# Altium PCB smart-water-sensor.PcbDoc (part 4 of 5)
Units mm, origin at the board's own origin, x right, y up, seen from the top; angles counter-clockwise.
Board outline 124.33 x 108.9 mm, 4 copper layers (Top Layer, Layer 1, Layer 2, Bottom Layer), stack 0.603 mm thick; 150 components, 74 nets, 469 pads, 463 vias.
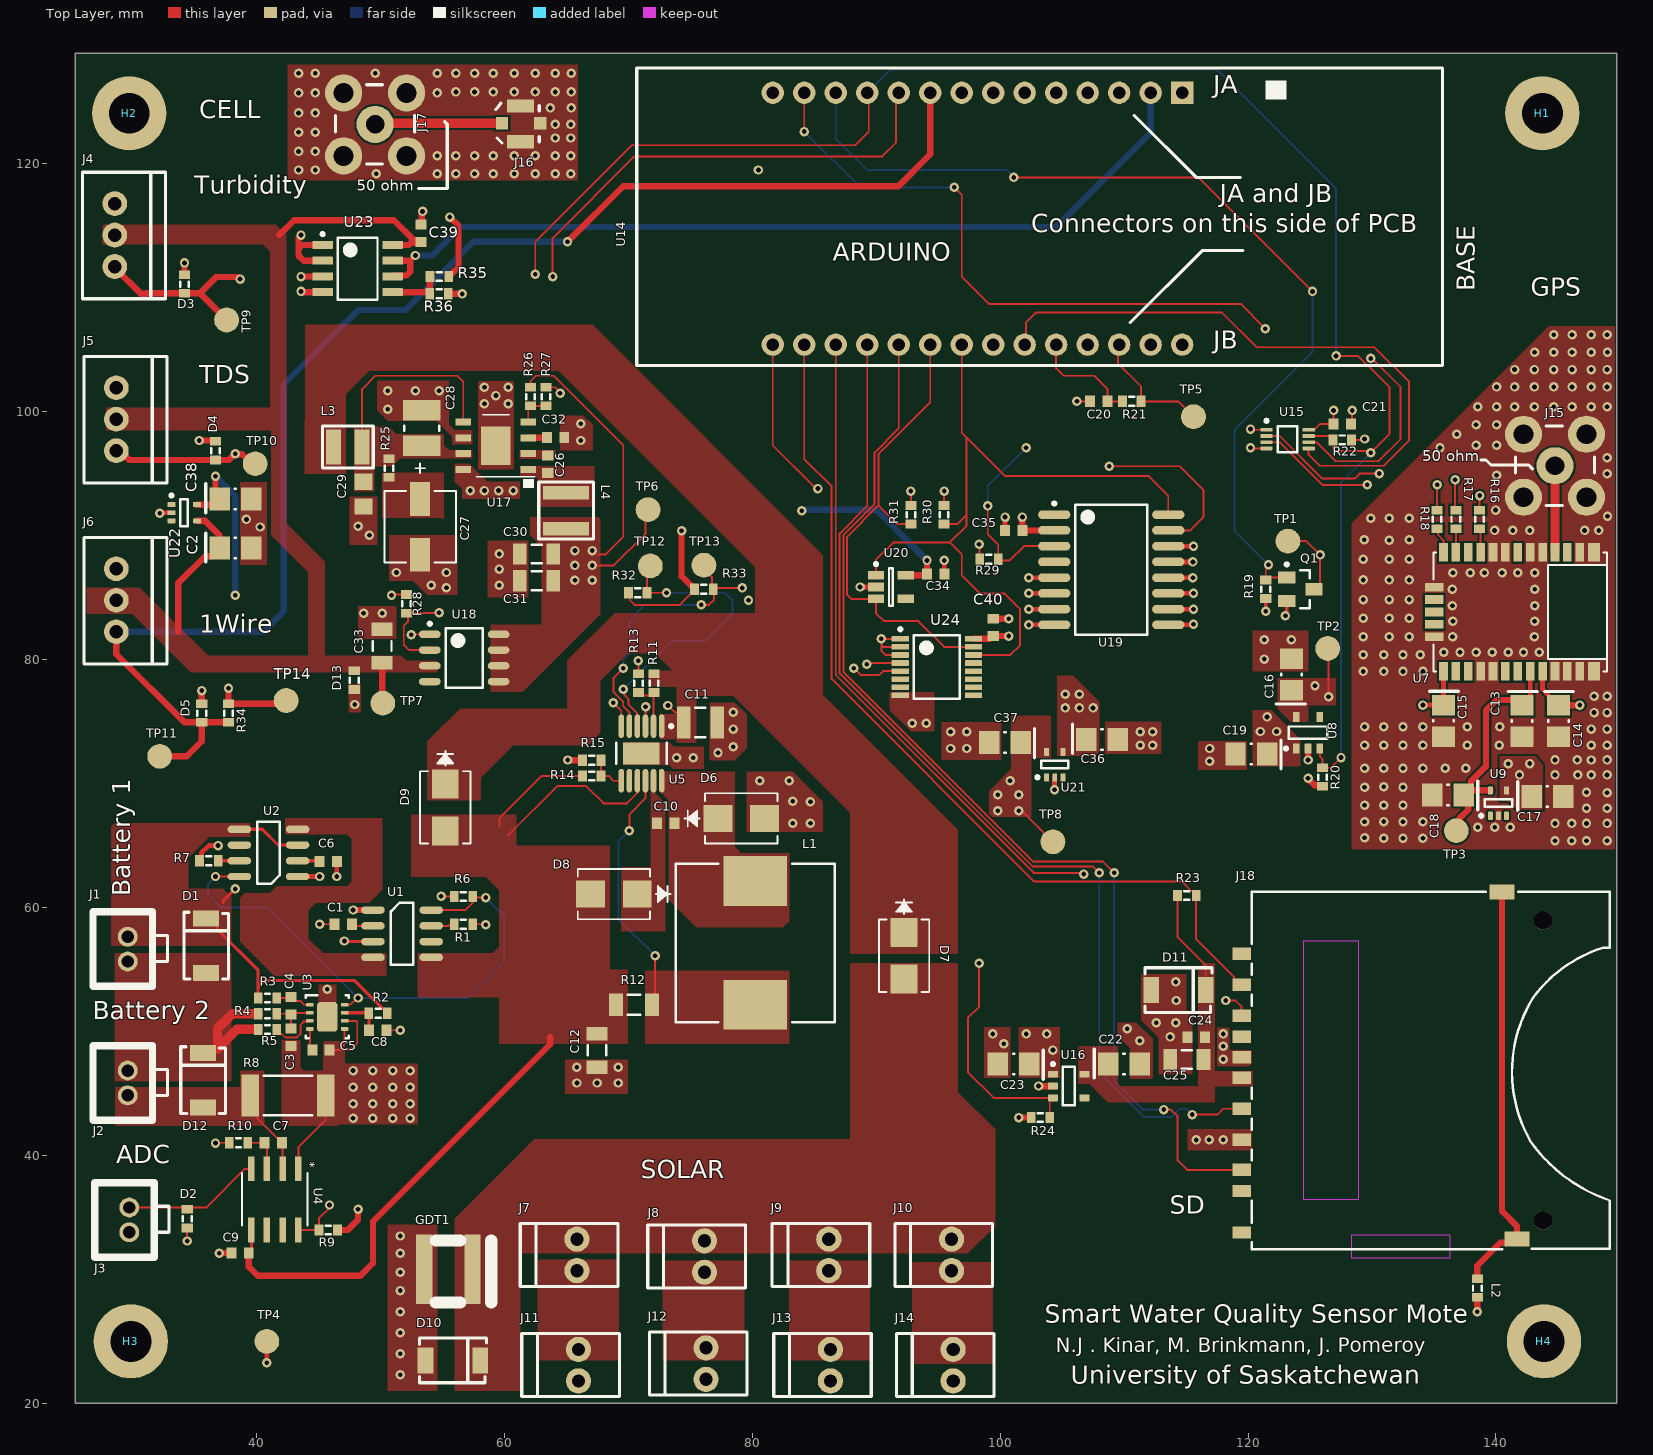
[diagram p0: Top Layer view]

## Part data (continued)
U5: library part CMP-0473-00138-1, "Power Tracking 2 A Battery Charger for Solar Power, 12-pin SOP (MSE-12-EDP), -40 to 125 degC, Pb-Free", Case/Package=MSOP, Manufacturer="Linear Technology", Max Charge Current=2A, Max Input Voltage=32V, Max Operating Temperature=125°C, Max Output Voltage=14.4V, Min Input Voltage=4.95V, Min Operating Temperature=-40°C, Output Voltage=4.2V, Package Quantity=37, Supplier Part Number 1=LT3652EMSE#PBF-ND, ComponentLink1Description="Manufacturer URL", ComponentLink1URL=http://www.linear.com/, ComponentLink2Description=Datasheet, ComponentLink2URL=http://cds.linear.com/docs/en/datasheet/3652fd.pdf, ComponentLink3Description="Package Specification", ComponentLink3URL=http://cds.linear.com/docs/en/packaging/05081666_G_MSE12.pdf, ComponentLink4Description=https://datasheet.ciiva.com/15114/getdatasheetpartid-367678-15114671.pdf?src-supplier=Verical, ComponentLink4URL=https://datasheet.ciiva.com/15114/getdatasheetpartid-367678-15114671.pdf?src-supplier=Verical, ComponentLink5Description=https://datasheet.ciiva.com/1932/28522-1932092.pdf?src-supplier=Digi-Key, ComponentLink5URL=https://datasheet.ciiva.com/1932/28522-1932092.pdf?src-supplier=Digi-Key, ComponentLink6Description=https://datasheet.ciiva.com/1139/1692510-1139705.pdf?src-supplier=Farnell, ComponentLink6URL=https://datasheet.ciiva.com/1139/1692510-1139705.pdf?src-supplier=Farnell, DatasheetVersion="Rev. D", Energy Source=Solar, Height=0.86mm, Length=4.04mm, Manufacturer Part Number=LT3652EMSE#PBF, Max Output Current=2A, Max Supply Voltage=32V, Min Supply Voltage=4.95V, Mounting Technology="Surface Mount", Number of Cells=3, Number of Outputs=1, Number of Pins=12, PackageDescription="12-Pin Plastic MSOP, Exposed Die Pad, Body 4.039 x 3 mm, Pitch 0.65 mm", PackageReference=MSE-12-EDP, PackageVersion="Rev. G, 05/2013", Packaging=Rail/Tube, PartNumber=LT3652EMSE#PBF, Pricing 1="1 = 7.40000, 25 = 4.91040, 100 = 4.06000, 250 = 3.85700, 500 = 3.77000 (USD)", Radiation Hardening=No, REACH SVHC="No SVHC", RoHS=TRUE, Stock 1=9413, Supplier 1=Digi-Key, Topology="Battery Charger", Vin Max(V)=32, Vin Min(V)=4.95, Width=3mm
U7: "u-blox CAM GNSS antenna module", Current - Receiving=29mA, Frequency=1.575GHz, Manufacturer=u-blox, Manufacturer Part Number=CAM-M8Q-0, Operating Temperature="-40°C ~ 85°C", Package / Case="31-SMD Module", Supplier Device Package=Module, Supplier Part Number 1=672-1013-1-ND, Voltage - Supply="1.6 V ~ 3.6 V", Antenna Connector="On-Board, Chip", Applications="General Purpose", Category="RF/IF and RFID", ComponentLink1Description=https://www.u-blox.com/sites/default/files/CAM-M8-FW3_DataSheet_(UBX-15031574).pdf, ComponentLink1URL=https://www.u-blox.com/sites/default/files/CAM-M8-FW3_DataSheet_(UBX-15031574).pdf, Data Interface="SPI, UART", Data Rate (Max)=-, Features=-, Memory Size=-, Modulation or Protocol="BeiDou, GLONASS, GNSS, GPS", Packaging="Cut Tape (CT)", Part Description="u-blox CAM GNSS antenna module", Part Status=Active, Pricing 1="1=47.18, 10=40.627, 50=26.4008, 100=18.256 (CAD)", RoHS="RoHS Compliant", Sensitivity=-167dBm, Stock 1=1338, Supplier 1=Digi-Key
U8 U16: library part CMP-2000-07464-1, "Ultra-Low-Noise, Low-IQ LDO, 0.25 A, Fixed 3.3 V Output, 2.2 to 5.5 V Input, -40 to 125 degC, 5-Pin SOT-23 (DBV), Green (RoHS & no Sb/Br), Tape and Reel", Case/Package=SOT-23, Dropout Voltage=250mV, Manufacturer="Texas Instruments", Max Input Voltage=5.5V, Max Operating Temperature=125degC, Max Output Current=250mA, Min Input Voltage=2.2V, Min Operating Temperature=-40degC, Nominal Output Voltage=3.3V, Output Voltage Accuracy=2%, Package Description="5-Pin Small Outline Transistor, Body 2.9 x 1.6 mm, Pitch 0.95 mm", Package Quantity=3000, Package Reference=DBV5, Package Version="4073253-4/N, 12/2014", Power Supply Rejection Ratio (PSRR)=82dB, Quiescent Current=425uA, Supplier Part Number 1=296-38557-1-ND, Accuracy=2%, Case\/Package=SOT-23, ComponentLink1Description=https://datasheet.ciiva.com/15083/lp5907-15083592.pdf?src-supplier=Digi-Key, ComponentLink1URL=https://datasheet.ciiva.com/15083/lp5907-15083592.pdf?src-supplier=Digi-Key, ComponentLink2Description=https://datasheet.ciiva.com/48475/lp5907-48475084.pdf?src-supplier=Avnet, ComponentLink2URL=https://datasheet.ciiva.com/48475/lp5907-48475084.pdf?src-supplier=Avnet, Contact Plating=Tin, Datasheet URL=http://www.ti.com/lit/ds/symlink/lp5907.pdf, Datasheet Version="Rev. L, 09/2016", Lead Free=LeadFree, Manufacturer Part Number=LP5907MFX-3.3/NOPB, Manufacturer URL=http://www.ti.com/, Mount=SurfaceMount, Mounting Technology=SurfaceMount, Number of Outputs=1, Number of Pins=5, Number of Regulators=1, Output Current=250mA, Output Type=Fixed, Output Voltage=3.3V, Package URL=http://www.ti.com/lit/ml/mpds018l/mpds018l.pdf, Packaging=TapeandReel, Polarity=Positive, Pricing 1="1 = 0.55000, 10 = 0.47500, 100 = 0.35470, 500 = 0.27872, 1000 = 0.21537 (USD)", Radiation Hardening=No, REACH SVHC=NoSVHC, RoHS=Yes, RoHSCompliant=true, Stock 1=414376, Supplier 1=Digi-Key
U9 U21 U22: library part CMP-0394-00925-2, "Single Output LDO, 50 mA, Fixed 3.3 V Output, 3 to 24 V Input, 5-pin SC70 (DCK), -40 to 85 degC, Green (RoHS & no Sb/Br)", Case/Package=SC, Current Rating=50mA, Dropout Voltage=415mV, Input Bias Current=3.2uA, Manufacturer="Texas Instruments", Max Input Voltage=24V, Max Operating Temperature=125°C, Max Output Voltage=3.3V, Max Power Dissipation=320mW, Min Current Limit=125mA, Min Input Voltage=3V, Min Operating Temperature=-40°C, Min Supply Voltage=2.5V, Output Voltage Accuracy=4%, Package Quantity=3000, Quiescent Current=3uA, Supplier Part Number 1=296-12008-1-ND, Accuracy=4%, Accuracy(%)=4, Code_JEDEC=MO-203, ComponentLink1Description="Manufacturer URL", ComponentLink1URL=http://www.ti.com/, ComponentLink2Description=Datasheet, ComponentLink2URL=http://www.ti.com/general/docs/lit/getliterature.tsp?genericPartNumber=TPS71533&fileType=pdf, ComponentLink3Description="Package Specification", ComponentLink3URL=http://www.ti.com/litv/pdf/mpds025f, ComponentLink4Description=https://datasheet.ciiva.com/22700/1835023-22700176.pdf?src-supplier=Element14, ComponentLink4URL=https://datasheet.ciiva.com/22700/1835023-22700176.pdf?src-supplier=Element14, ComponentLink5Description=https://datasheet.ciiva.com/27051/1116751-27051464.pdf?src-supplier=Jameco, ComponentLink5URL=https://datasheet.ciiva.com/27051/1116751-27051464.pdf?src-supplier=Jameco, ComponentLink6Description=https://datasheet.ciiva.com/7992/1854688-7992972.pdf?src-supplier=Element14, ComponentLink6URL=https://datasheet.ciiva.com/7992/1854688-7992972.pdf?src-supplier=Element14, DatasheetVersion=SLVS338P, Eco-Plan="Green (RoHS & no Sb/Br)", Fixed Output Options(V)=3.3, Height=0.9mm, Iout(Max)(A)=0.05, Iq(Typ)(mA)=0.003, Lead Free="Lead Free", Length=2mm, Manufacturer Part Number=TPS71533DCKR, Max Output Current=50mA, Min Output Voltage=3.3V, Mounting Technology="Surface Mount", Nominal Output Voltage=3.3V, Number of Outputs=1, Number of Pins=5, Number of Regulators=1, Output Current=50mA, Output Type=Fixed, Output Voltage=3.3V, PackageDescription="5-Pin Plastic Small-Outline, Body 2 x 1.25 mm, Pitch 0.65 mm", PackageReference=DCK0005A, PackageVersion=4093553-3/G, Packaging="Tape and Reel", PartNumber=TPS71533DCKR, Polarity=Positive, Power Dissipation=320mW, Power Rating=320mW, Pricing 1="1 = 0.90000, 10 = 0.80200, 100 = 0.62540, 500 = 0.51664, 1000 = 0.40788 (USD)", Radiation Hardening=No, REACH SVHC="No SVHC", RoHS=Yes, Stock 1=159612, SubFamily="Single Channel LDO", Supplier 1=Digi-Key, Termination=SMD/SMT, Vdo(Typ)(mV)=415, Vin(Max)(V)=24, Vin(Min)(V)=3, Vout Adj(Max)(V)=3.3, Vout Adj(Min)(V)=3.3, Width=1.25mm
U14: "Arduino MKRGSM v2.2 board (800 mil spacing)", Manufacturer=Arduino, Manufacturer Part Number=ABX00018, Supplier Part Number 1=1050-1149-ND, ComponentLink1Description=http://datasheet.octopart.com/ABX00018-Arduino-datasheet-102038264.pdf?src-supplier=Newark, ComponentLink1URL=http://datasheet.octopart.com/ABX00018-Arduino-datasheet-102038264.pdf?src-supplier=Newark, Pricing 1="1 = 71.13000 (USD)", Stock 1=375, Supplier 1=Digi-Key
U15: library part CMP-0859-00580-3, "Dual Buffer/Driver With 3-State Outputs, DCU0008A, LARGE T&R", Case/Package=VSSOP, F @ Nom Voltage(Max)(Mhz)=150, Generic Part Number=SN74LVC2G241, High Level Output Current=-32mA, ICC @ Nom Voltage(Max)(mA)=0.01, Low Level Output Current=32mA, Manufacturer="Texas Instruments", Max Operating Temperature=125°C, Max Supply Voltage=5.5V, Min Operating Temperature=-40°C, Min Supply Voltage=1.65V, Operating Temperature Range(C)="-40 to 125", Package Quantity=3000, Quiescent Current=10uA, Rating=Catalog, Supplier Part Number 1=296-11936-1-ND, tpd @ Nom Voltage(Max)(ns)=8.8,4.8,4.3,3.7, Voltage(Nom)(V)=1.8,2.5,3.3,5, 3-State Output=Yes, Bits(#)=2, ComponentLink1Description=https://datasheet.ciiva.com/15095/getdatasheetpartid-196853-15095029.pdf?src-supplier=Verical, ComponentLink1URL=https://datasheet.ciiva.com/15095/getdatasheetpartid-196853-15095029.pdf?src-supplier=Verical, ComponentLink2Description=https://datasheet.ciiva.com/26861/sn74lvc2g241dcur-26861446.pdf?src-supplier=IIIC, ComponentLink2URL=https://datasheet.ciiva.com/26861/sn74lvc2g241dcur-26861446.pdf?src-supplier=IIIC, ComponentLink3Description=https://datasheet.ciiva.com/1833/sn74lvc2g241-1833955.pdf?src-supplier=Digi-Key, ComponentLink3URL=https://datasheet.ciiva.com/1833/sn74lvc2g241-1833955.pdf?src-supplier=Digi-Key, ComponentLink4Description=https://datasheet.ciiva.com/1833/sn74lvc2g241-1833956.pdf?src-supplier=Digi-Key, ComponentLink4URL=https://datasheet.ciiva.com/1833/sn74lvc2g241-1833956.pdf?src-supplier=Digi-Key, ComponentLink5Description=https://datasheet.ciiva.com/1833/sn74lvc2g241-1833957.pdf?src-supplier=Digi-Key, ComponentLink5URL=https://datasheet.ciiva.com/1833/sn74lvc2g241-1833957.pdf?src-supplier=Digi-Key, ComponentLink6Description=https://datasheet.ciiva.com/26220/sn74lvc2g241-26220870.pdf?src-supplier=Avnet+Europe, ComponentLink6URL=https://datasheet.ciiva.com/26220/sn74lvc2g241-26220870.pdf?src-supplier=Avnet+Europe, ComponentLink7Description=https://datasheet.ciiva.com/48702/001073977-da-01-en-ic-buff-dvr-tr-sn74lvc2g241dcur-us-8-tid-48702679.pdf?src-supplier=Conrad, ComponentLink7URL=https://datasheet.ciiva.com/48702/001073977-da-01-en-ic-buff-dvr-tr-sn74lvc2g241dcur-us-8-tid-48702679.pdf?src-supplier=Conrad, Contact Plating=Gold, DatasheetVersion=SCES210N, Height=0.8mm, Input Type=CMOS/TTL, Lead Free="Lead Free", Length=2.1mm, Logic=True, Logic Function=Buffer, Manufacturer Part Number=SN74LVC2G241DCUR, Mount="Surface Mount", Number of Bits=2, Number of Bits per Element=1, Number of Channels=2, Number of Elements=2, Number of Gates=2, Number of Input Lines=2, Number of Inputs=2, Number of Output Lines=2, Number of Outputs=2, Number of Pins=8, Output Drive (IOL/IOH)(Max)(mA)=32/-32, Output Type=CMOS, PackageReference=DCU0008A, Packaging="Tape and Reel", Polarity=Non-Inverting, Pricing 1="1 = 0.61000, 10 = 0.52100, 100 = 0.38930, 500 = 0.30592, 1000 = 0.23639 (USD)", Propagation Delay=12.5ns, Radiation Hardening=No, REACH SVHC="No SVHC", RoHS=Yes, Schmitt Trigger=No, Stock 1=41086, Sub-Family="Non-Inverting Buffer/Driver", Supplier 1=Digi-Key, Technology Family=LVC, Turn-On Delay Time=12.5ns, VCC(Max)(V)=5.5, VCC(Min)(V)=1.65, Width=2.4mm
U17: Manufacturer="Texas Instruments", Max Operating Temperature=125°C, Min Operating Temperature=-40°C, Quiescent Current=75uA, Supplier Part Number 1=296-47269-1-ND, ComponentLink1Description=http://www.ti.com/lit/ds/symlink/lmr23625.pdf?src-supplier=Digi-Key, ComponentLink1URL=http://www.ti.com/lit/ds/symlink/lmr23625.pdf?src-supplier=Digi-Key, Lead Free="Lead Free", Manufacturer Part Number=LMR23625CFDDAR, Pricing 1="1 = 3.24000, 10 = 2.91200, 100 = 2.38610, 500 = 2.03124, 1000 = 1.71310 (USD)", RoHS=No, Stock 1=6768, Supplier 1=Digi-Key
U18: library part BSP742TXUMA1, Manufacturer=Infineon, Max Operating Temperature=150°C, Max Power Dissipation=1.5W, Max Supply Voltage=34V, Min Operating Temperature=-40°C, Nominal Supply Current=1mA, Output Current=800mA, Supplier Part Number 1=BSP742TXUMA1CT-ND, ComponentLink1Description=http://components.arrow.com/part/dataview/52118417S8296913N2051?src-supplier=Arrow, ComponentLink1URL=http://components.arrow.com/part/dataview/52118417S8296913N2051?src-supplier=Arrow, ComponentLink2Description=http://www.farnell.com/datasheets/2333312.pdf?src-supplier=Farnell, ComponentLink2URL=http://www.farnell.com/datasheets/2333312.pdf?src-supplier=Farnell, ComponentLink3Description=http://components.arrow.com/part/dataview/0323_00171565?src-supplier=Arrow+Europe, ComponentLink3URL=http://components.arrow.com/part/dataview/0323_00171565?src-supplier=Arrow+Europe, ComponentLink4Description=http://www.mouser.com/ds/2/196/Infineon-BSP742T-DS-v01_03-EN-1111163.pdf?src-supplier=Mouser, ComponentLink4URL=http://www.mouser.com/ds/2/196/Infineon-BSP742T-DS-v01_03-EN-1111163.pdf?src-supplier=Mouser, ComponentLink5Description=http://www.infineon.com/dgdl/Infineon-BSP742T-DS-v01_03-en.pdf?fileId=db3a30431689f4420116d2efc3000bf7&ack=t&src-supplier=Avnet, ComponentLink5URL=http://www.infineon.com/dgdl/Infineon-BSP742T-DS-v01_03-en.pdf?fileId=db3a30431689f4420116d2efc3000bf7&ack=t&src-supplier=Avnet, ComponentLink6Description=https://www.infineon.com/dgdl/Infineon-BSP742T-DS-v01_03-EN.pdf?fileId=5546d4625a888733015aae0b51d34c49&src-supplier=Digi-Key, ComponentLink6URL=https://www.infineon.com/dgdl/Infineon-BSP742T-DS-v01_03-EN.pdf?fileId=5546d4625a888733015aae0b51d34c49&src-supplier=Digi-Key, ComponentLink7Description=http://www.farnell.com/datasheets/2333312.pdf?src-supplier=Newark, ComponentLink7URL=http://www.farnell.com/datasheets/2333312.pdf?src-supplier=Newark, Halogen Free="Halogen Free", Lead Free="Lead Free", Manufacturer Part Number=BSP742TXUMA1, Mount="Surface Mount", Number of Channels=1, Number of Outputs=1, Number of Pins=8, Packaging="Tape and Reel", Power Dissipation=1.5W, Pricing 1="1 = 1.73000, 10 = 1.53200, 100 = 1.21050, 500 = 0.93878, 1000 = 0.74115 (USD)", Radiation Hardening=No, RoHS=Yes, Stock 1=10093, Supplier 1=Digi-Key
U19: library part CMP-0254-00375-1, "Extremely Accurate I2C-Integrated Real-Time Clock/TCXO/Crystal, 16-Pin SO, -40 to 85 degC, RoHS Qualified, Reel", Case/Package=SOIC, Manufacturer=Maxim, Max Operating Temperature=85°C, Max Supply Voltage=5.5V, Min Operating Temperature=-40°C, Min Supply Voltage=2.3V, Operating Supply Voltage=3.3V, Package Quantity=1000, Supplier Part Number 1=DS3231SN#T&RCT-ND, Code_IPC=SOIC127P1030-16, Code_JEDEC=MS-013-AA, ComponentLink1Description="Manufacturer URL", ComponentLink1URL=http://www.maxim-ic.com, ComponentLink2Description=Datasheet, ComponentLink2URL=http://datasheets.maxim-ic.com/en/ds/DS3231.pdf, ComponentLink3Description="Package Specification", ComponentLink3URL=http://pdfserv.maxim-ic.com/package_dwgs/21-0042.PDF, ComponentLink4Description=https://datasheet.ciiva.com/17307/ds3231-17307128.pdf?src-supplier=Avnet+Europe, ComponentLink4URL=https://datasheet.ciiva.com/17307/ds3231-17307128.pdf?src-supplier=Avnet+Europe, ComponentLink5Description=https://datasheet.ciiva.com/12291/ds3231-102175-12291260.pdf?src-supplier=Mouser, ComponentLink5URL=https://datasheet.ciiva.com/12291/ds3231-102175-12291260.pdf?src-supplier=Mouser, ComponentLink6Description=https://datasheet.ciiva.com/14244/ds3231-14244637.pdf?src-supplier=Avnet, ComponentLink6URL=https://datasheet.ciiva.com/14244/ds3231-14244637.pdf?src-supplier=Avnet, ComponentLink7Description=https://datasheet.ciiva.com/14244/ds3231-14244733.pdf?src-supplier=Avnet, ComponentLink7URL=https://datasheet.ciiva.com/14244/ds3231-14244733.pdf?src-supplier=Avnet, Contact Plating=Tin, DatasheetVersion="Rev 8, Jul-2010", Date Format=YY-MM-DD-dd, Interface=I2C, Lead Free="Lead Free", Logic Function=Clock, Manufacturer Part Number=DS3231SN#T&R, Mount="Surface Mount", Number of Pins=16, PackageDescription="16-Pin Small-Outline IC, Wide (0.3in), 1.27 mm Pitch, SOIC (W), RoHS Qualified", PackageReference=W16#H2, PackageVersion="revD, 2010", Packaging="Tape and Reel", Pricing 1="1=9.05000, 10=8.17200, 25=7.79160, 100=6.76520, 250=6.46120, 500=5.89108 (USD)", Radiation Hardening=No, RoHS=Yes, Stock 1=3292, Supplier 1=Digi-Key, Time Format=HH:MM:SS
U20: library part CMP-0219-00326-1, "I²C/SMBus Silicon Serial Number, 5-pin SOT23, -40° to + 85° C, Pb-Free, Tape and Reel", Case/Package=SOT-23-5, Manufacturer=Maxim, Max Operating Temperature=85°C, Max Supply Voltage=5.25V, Min Operating Temperature=-40°C, Min Supply Voltage=1.62V, Package Quantity=1, Supplier Part Number 1=DS28CM00R-A00+TCT-ND, Code_JEDEC=MO-178AA, ComponentLink1Description=https://datasheets.maximintegrated.com/en/ds/DS28CM00.pdf, ComponentLink1URL=https://datasheets.maximintegrated.com/en/ds/DS28CM00.pdf, ComponentLink2Description=http://datasheets.maximintegrated.com/en/ds/DS28CM00.pdf, ComponentLink2URL=http://datasheets.maximintegrated.com/en/ds/DS28CM00.pdf, ComponentLink3Description=http://www.mouser.com/ds/2/256/DS28CM00-102134.pdf, ComponentLink3URL=http://www.mouser.com/ds/2/256/DS28CM00-102134.pdf, DatasheetVersion=Nov-2006, Height=1.3mm, Lead Free="Lead Free", Length=3mm, Manufacturer Part Number=DS28CM00R-A00+T, Mount="Surface Mount", Number of Pins=5, PackageDescription="5-Pin Small-Outline Transistor Package, 0.95 mm Pitch, 2.8 mm Lead Span, SOT-23, Pb-Free", PackageReference=U5+1, PackageVersion="revF, 2006", Packaging="Tape and Reel", Pricing 1="1 = 1.67000, 10 = 1.50400, 25 = 1.41880, 100 = 1.20880, 250 = 1.13508, 500 = 0.99318, 1000 = 0.82292 (USD)", Radiation Hardening=No, REACH SVHC=Unknown, RoHS=Yes, Stock 1=17327, Supplier 1=Digi-Key, Width=1.75mm
U23: library part CMP-0272-00490-3, "Low Cost, Low Power, Rail-to-Rail Operational Amplifier MicroAmplifier(TM) Series, 2.7 to 5.5 V, -40 to 85 degC, 8-pin SOIC (D8), Green (RoHS & no Sb/Br)", Case/Package=D, Input Bias Current=10pA, Input Offset Voltage (Vos)=6mV, Manufacturer="Texas Instruments", Max Operating Temperature=85°C, Max Supply Voltage=5.5V, Min Operating Temperature=-40°C, Min Supply Voltage=2.7V, Nominal Supply Current=500uA, Package Quantity=2500, Power Supply Rejection Ratio (PSRR)=90.46dB, Rating=Catalog, Supplier Part Number 1=296-46152-1-ND, Total Supply Voltage(Max)(+5V is 5, +/-5V is 10)=5.5, Total Supply Voltage(Min)(+5V is 5, +/-5V is 10)=2.7, Voltage Gain=124dB, Bandwidth=1MHz, CMRR(Min)(dB)=74, Code_JEDEC=MS-012, Common Mode Rejection Ratio=74dB, ComponentLink1Description="Manufacturer URL", ComponentLink1URL=http://www.ti.com/, ComponentLink2Description=Datasheet, ComponentLink2URL=http://www.ti.com/lit/ds/symlink/opa2342.pdf, ComponentLink3Description="Package Specification", ComponentLink3URL=http://www.ti.com/litv/pdf/msoi002j, ComponentLink4Description=https://datasheet.ciiva.com/1812/opa4342-1812892.pdf?src-supplier=Digi-Key, ComponentLink4URL=https://datasheet.ciiva.com/1812/opa4342-1812892.pdf?src-supplier=Digi-Key, DatasheetVersion=SBOS106A, Eco-Plan="Green (RoHS & no Sb/Br)", Gain Bandwidth Product=1MHz, GBW(Typ)(MHz)=1, IIB(Max)(pA)=10, Iq per channel(Max)(mA)=0.25, Lead Free="Lead Free", Manufacturer Part Number=OPA2342UA/2K5, Max I/O Voltage=6mV, Mounting Technology="Surface Mount", Nominal Gain Bandwidth Product=1MHz, Number of Channels=2, Number of Circuits=2, Number of Elements=2, Number of Pins=8, Offset Drift(Typ)(uV/C)=3, PackageDescription="8-Pin Plastic Small Outline, Body 4.9 x 3.9 mm, Pitch 1.27 mm", PackageReference=D0008A, PackageVersion="4040047-3/M, 06/2011", Packaging="Tape and Reel", Packing="LARGE T&R", PartNumber=OPA2342UA/2K5, Pricing 1="1=1.64000, 10=1.47100, 100=1.18250, 500=0.97154, 1000=0.80500 (USD)", Radiation Hardening=No, Slew Rate(Typ)(V/us)=1, Stock 1=2557, Sub Family="Low Input Bias Current Amp (<=10pA), Low Power Amp (<=500uA), Low Supply Voltage Amplifier (<=2.7V), Precision Amplifier", Supplier 1=Digi-Key, Unity Gain Bandwidth Product=1MHz, Vio (25C)(Max)(mV)=6
U24: library part CMP-0314-00331-2, "Remote 8-Bit I2C and Low-Power I/O Expander with Interrupt Output and Configuration Register, 2.3 to 5.5 V, -40 to 85 degC, 16-pin TSSOP (PW), Green (RoHS & no Sb/Br)", 5V Tolerant I/O=Yes, Case/Package=TSSOP, Frequency=400kHz, Manufacturer="Texas Instruments", Max Frequency(kHz)=400, Max Operating Temperature=85°C, Min Operating Temperature=-40°C, Operating Supply Voltage=5.5V, Package Quantity=1, Supplier Part Number 1=296-21764-1-ND, # of I/Os=8, Code_JEDEC=MO-153, ComponentLink1Description=Datasheet, ComponentLink1URL=http://www.ti.com/general/docs/lit/getliterature.tsp?genericPartNumber=PCA9534&fileType=pdf, ComponentLink3Description=https://datasheet.ciiva.com/15134/getdatasheetpartid-253001-15134573.pdf?src-supplier=Verical, ComponentLink3URL=https://datasheet.ciiva.com/15134/getdatasheetpartid-253001-15134573.pdf?src-supplier=Verical, ComponentLink4Description=https://datasheet.ciiva.com/1780/pca9534-1780321.pdf?src-supplier=Digi-Key, ComponentLink4URL=https://datasheet.ciiva.com/1780/pca9534-1780321.pdf?src-supplier=Digi-Key, ComponentLink5Description=https://datasheet.ciiva.com/1780/pca9534-1780322.pdf?src-supplier=Digi-Key, ComponentLink5URL=https://datasheet.ciiva.com/1780/pca9534-1780322.pdf?src-supplier=Digi-Key, ComponentLink6Description=https://datasheet.ciiva.com/1780/pca9534-1780323.pdf?src-supplier=Digi-Key, ComponentLink6URL=https://datasheet.ciiva.com/1780/pca9534-1780323.pdf?src-supplier=Digi-Key, ComponentLink7Description=https://datasheet.ciiva.com/3149/pca9534-3149291.pdf?src-supplier=Avnet, ComponentLink7URL=https://datasheet.ciiva.com/3149/pca9534-3149291.pdf?src-supplier=Avnet, Configuration Registers=Yes, DatasheetVersion=SCPS124F, Eco-Plan="Green (RoHS & no Sb/Br)", fSCLK(Max)(MHz)="0.1, 0.4", I2C Address="0100 xxx", Interrupt Output=Yes, Lead Free="Lead Free", Low Power=Yes, Manufacturer Part Number=PCA9534PWR, Max Frequency=400kHz, Mounting Technology="Surface Mount", No. of Outputs=8, Number of I/Os=8, Number of Outputs=8, Number of Pins=16, PackageDescription="16-Pin Plastic Thin Small Outline Package 5 x 4.4 mm Body ,0.65 mm Pitch", PackageReference=PW0016A, PackageVersion="revG, Feb-2011", Packaging="Tape and Reel", PartNumber=PCA9534PWR, Pricing 1="1=1.74000, 10=1.56100, 100=1.25490, 500=1.03104, 1000=0.85428 (USD)", Push-Pull I/O Type=Yes, Radiation Hardening=No, RoHS=Yes, Stock 1=48653, SubFamily="I2C IO Expander", Supplier 1=Digi-Key, VCC(Max)(V)=5.5, VCC(Min)(V)=2.3, Vcc range(V)="2.3 to 5.5", Weight=0.002183oz

## Via types
v1: diameter 0.762, hole 0.381, Top Layer to Bottom Layer, tented both sides, 463 vias